# EAGLE board MainBoard 1.5.2 (EAGLE 9.6.2)
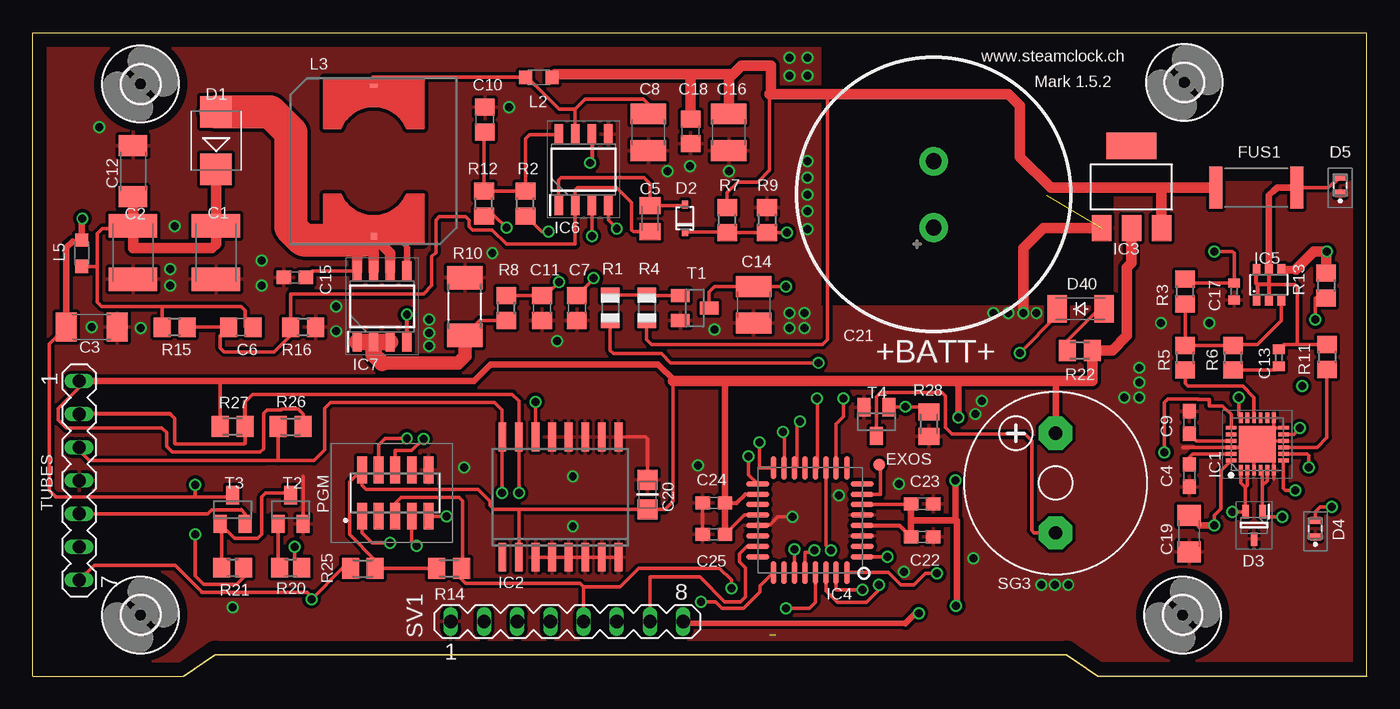
[diagram p0: board, top side]
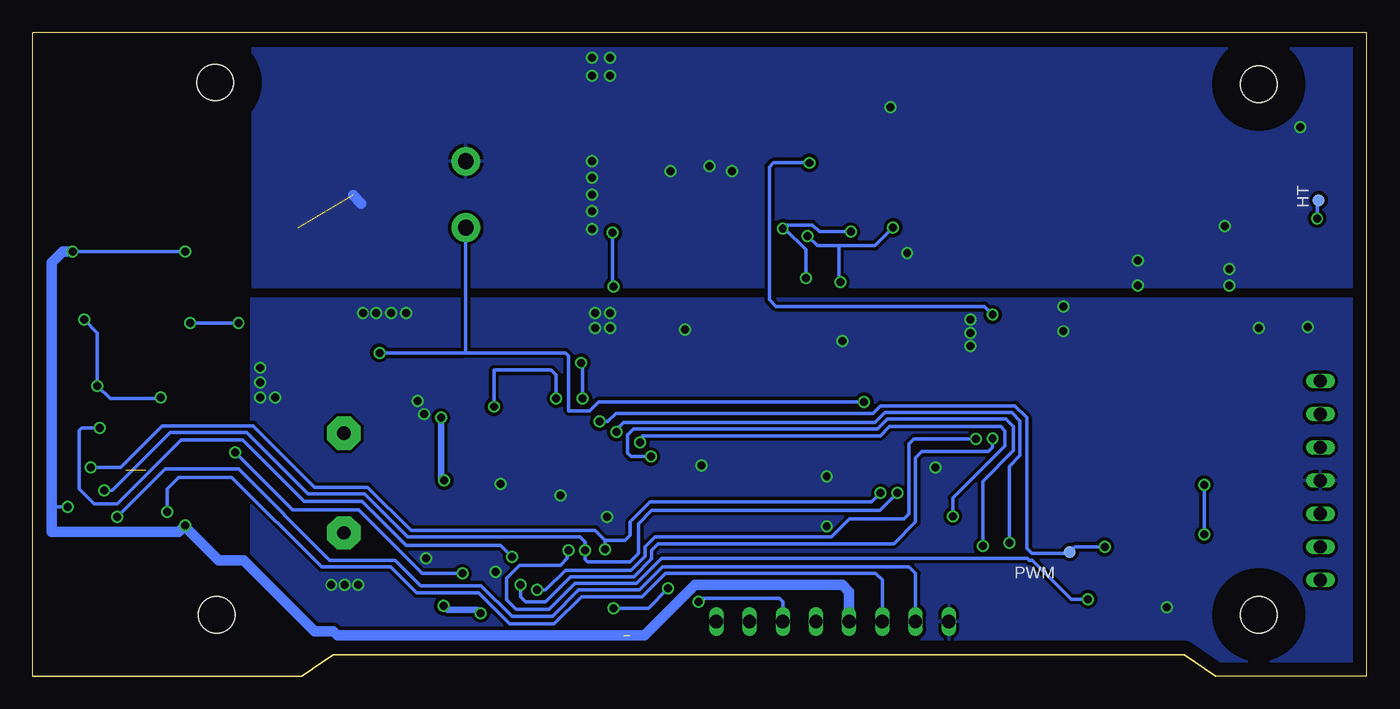
[diagram p1: board, bottom side, seen from below]

Size 102.11 x 49.28 mm. Coordinates in mm from the lower left corner, seen from the top.
Outline: 0,49.28 102.11,49.28 102.11,0 81.53,0 79.12,1.65 13.97,1.65 11.56,0 0,0 0,49.28
Copper layers (1*16): Top 0.035mm / dielectric 1.5mm / Bottom 0.035mm
Design rules "default *": minimum track width 10mil, minimum drill 24mil, track to track 4mil, track to pad 1mil, pad to pad 1mil, via to via 8mil, smd to smd 8mil, copper to edge 40mil, drill to drill 8mil, minimum pad ring 1mil, minimum via ring 3mil, stop-mask expansion 4mil, vias tented up to drill 0mil, thermal gap 10mil
Net classes: 0 default: width 0.254 mm, clearance 0.254 mm; 1 pwr: width 0.254 mm, clearance 0.356 mm

## Footprints (pad centres in the part's own frame; a part is rotated, then mirrored left to right if it is on the bottom)
C1812K = smd 1.8 x 3.7: 1 -2.05,0; 2 2.05,0
C1808 = smd 1.6 x 2.2: 1 -1.95,0; 2 1.95,0
C0603 = smd 1.1 x 1: 1 -0.85,0; 2 0.85,0
C0805K = smd 1.3 x 1.6: 1 -1,0; 2 1,0
C0805 = smd 1.3 x 1.5: 1 -0.95,0; 2 0.95,0
C1210 = smd 1.6 x 2.7: 1 -1.4,0; 2 1.4,0
C0402 = smd 0.7 x 0.9: 1 -0.65,0; 2 0.65,0
C1206 = smd 1.6 x 1.8: 1 -1.4,0; 2 1.4,0
CAP0805-NP = smd 1.524 x 1.524: 1 0,0; 2 2.286,0
ELNA21.5X8.0 = drill 1.2 pad 2.184: + -2.54,0; - 2.54,0
SMB = smd 2.4 x 2.4: A 2.2,0; C -2.2,0
SOD323 = smd 0.6 x 0.45: A 1.06,0; C -1.06,0
SOT65P210X110-3N = smd 1.05 x 0.5: 1 -1.05,0.65; 2 -1.05,-0.65; 3 1.05,0
ESDA8P801U1M = smd 0.55 x 0.8: 1 -0.625,0; 2 0.625,0
SOD-123_MINI-SMA = smd 1.5 x 2.1: A 1.8,0; C -1.8,0
TP09R = smd 0.9 x 0.9: TP 0,0
R6332 = smd 1 x 3.2: 1 -3.1,0; 2 3.1,0
2,8 = hole 2.8: 0,0
QFN50P400X400X100-25N = smd 0.8 x 0.3: 1 -2,1.25; 2 -2,0.75; 3 -2,0.25; 4 -2,-0.25; 5 -2,-0.75; 6 -2,-1.25; 13 2,-1.25; 14 2,-0.75; 15 2,-0.25; 16 2,0.25; 17 2,0.75; 18 2,1.25 | smd 0.3 x 0.8: 7 -1.25,-2; 8 -0.75,-2; 9 -0.25,-2; 10 0.25,-2; 11 0.75,-2; 12 1.25,-2; 19 1.25,2; 20 0.75,2; 21 0.25,2; 22 -0.25,2; 23 -0.75,2; 24 -1.25,2 | smd 2.8 x 2.8: 25 0,0
SO16W = smd 0.6 x 2.2: 1 -4.445,-4.6; 2 -3.175,-4.6; 3 -1.905,-4.6; 4 -0.635,-4.6; 5 0.635,-4.6; 6 1.905,-4.6; 7 3.175,-4.6; 8 4.445,-4.6; 9 4.445,4.6; 10 3.175,4.6; 11 1.905,4.6; 12 0.635,4.6; 13 -0.635,4.6; 14 -1.905,4.6; 15 -3.175,4.6; 16 -4.445,4.6
SOT223 = smd 1.499 x 2.007: 1 -2.261,-3.15; 2 0.025,-3.15; 3 2.311,-3.15 | smd 3.81 x 2.007: 4 0,3.15
QFP032 = smd 0.432 x 1.778: 1 0,0; 2 0.8,0; 3 1.599,0; 4 2.399,0; 5 3.199,0; 6 3.998,0; 7 4.798,0; 8 5.598,0; 17 5.588,8.001; 18 4.798,7.997; 19 3.998,7.997; 20 3.199,7.997; 21 2.399,7.997; 22 1.599,7.997; 23 0.799,7.997; 24 0,7.997 | smd 1.778 x 0.432: 9 6.807,1.194; 10 6.807,2.007; 11 6.807,2.794; 12 6.807,3.607; 13 6.807,4.394; 14 6.807,5.182; 15 6.807,5.994; 16 6.816,6.803; 25 -1.194,6.807; 26 -1.194,5.994; 27 -1.194,5.182; 28 -1.194,4.394; 29 -1.194,3.607; 30 -1.194,2.794; 31 -1.194,2.007; 32 -1.194,1.194
SOT23-6 = smd 0.6 x 0.9: 1 -0.95,-1.15; 2 0,-1.15; 3 0.95,-1.15; 4 0.95,1.15; 5 0,1.15; 6 -0.95,1.15
SOIC127P600X175-8N = smd 1.525 x 0.65: 1 -2.712,1.905; 2 -2.712,0.635; 3 -2.712,-0.635; 4 -2.712,-1.905; 5 2.712,-1.905; 6 2.712,-0.635; 7 2.712,0.635; 8 2.712,1.905
SOIC127P600X175-8N' = smd 1.525 x 0.7: 1 -2.712,1.905; 2 -2.712,0.635; 3 -2.712,-0.635; 4 -2.712,-1.905; 5 2.712,-1.905; 6 2.712,-0.635; 7 2.712,0.635; 8 2.712,1.905
L2012C = smd 1 x 1: 1 -1,0; 2 1,0
MSS7341 = smd 0.61 x 0.305: 1 0,5.765 | smd 0.5 x 0.5: 2 0,-5.765
2002132100010C4LF = smd 0.76 x 2.05: 1 2.54,1.775; 2 2.54,-1.775; 3 1.27,1.775; 4 1.27,-1.775; 5 0,1.775; 6 0,-1.775; 7 -1.27,1.775; 8 -1.27,-1.775; 9 -2.54,1.775; 10 -2.54,-1.775
R0805 = smd 1.1 x 1.4: 1 -1,0; 2 1,0
R0805' = smd 1.3 x 1.5: 1 -0.95,0; 2 0.95,0
R2010 = smd 1.8 x 2.7: 1 -2.2,0; 2 2.2,0
M2012 = smd 1.3 x 1.6: 1 -0.95,0; 2 0.95,0
R2012 = smd 1.3 x 1.5: 1 -0.85,0; 2 0.85,0
F/CM12P = drill 1.016 pad 2.54 octagon: + 3.81,0; - -3.81,0
MA08-1 = drill 1.016 long: 1 -8.89,0; 2 -6.35,0; 3 -3.81,0; 4 -1.27,0; 5 1.27,0; 6 3.81,0; 7 6.35,0; 8 8.89,0
SOT23 = smd 1 x 1.4: 1 -0.95,-1.1; 2 0.95,-1.1; 3 0,1.1
MA07-1 = drill 1.016 long: 1 -7.62,0; 2 -5.08,0; 3 -2.54,0; 4 0,0; 5 2.54,0; 6 5.08,0; 7 7.62,0

## Placement (x,y rotation side)
C1  1uF  [C1812K]  14.03,32.45 270 top
C2  1uF  [C1812K]  7.68,32.45 270 top
C3  0.1uF  [C1808]  4.51,26.73 0 top
C4  1uF  [C0603]  88.52,15.37 90 top
C5  220pF  [C0805K]  47.24,35.05 270 top
C6  100pF  [C0805]  15.94,26.73 180 top
C7  430pF  [C0805]  41.66,28.19 270 top
C8  100uF  [C1210]  47.12,41.66 90 top
C9  1uF  [C0603]  88.52,19.43 270 top
C10  100nF  [C0805]  34.61,42.61 90 top
C11  1nF  [C0805]  38.99,28.19 270 top
C12  0.1uF  [C1808]  7.68,38.67 90 top
C13  100nF  [C0402]  95.38,24.38 90 top
C14  47uF  [C1210]  55.18,28.45 270 top
C15  560pF/250V  [C0603]  20.07,30.54 180 top
C16  100uF  [C1210]  53.28,41.66 90 top
C17  100nF  [C0402]  91.95,29.46 90 top
C18  0.1uF  [C0805]  50.36,41.72 270 top
C19  4uF7  [C1206]  88.52,10.92 90 top
C20  0.1uF  [CAP0805-NP]  47.05,12.76 90 top
C21  [ELNA21.5X8.0]  68.96,36.89 90 top
C22  100n  [C0603]  68.07,10.67 0 top
C23  100nF  [C0603]  68.07,13.21 0 top
C24  100nF  [C0603]  52.13,13.27 180 top
C25  100nF  [C0603]  52.13,10.86 180 top
D1  ES1D  [SMB]  14.03,41.02 90 top
D2  BAT54  [SOD323]  49.91,35.05 90 top
D3  ESDA25W  [SOT65P210X110-3N]  93.47,11.56 270 top
D4  ESDA25P35-1U1M  [ESDA8P801U1M]  98.17,11.3 90 top
D5  ESDA25P35-1U1M  [ESDA8P801U1M]  100.08,37.59 90 top
D40  CGRM4001-G  [SOD-123_MINI-SMA]  80.2,28.13 0 top
EXOS  PTR1TP09R  [TP09R]  64.77,16.19 0 top
FUS1  [R6332]  93.66,37.4 180 top
H3  MOUNT-HOLE2.8  [2,8]  8.26,45.34 0 top
H4  MOUNT-HOLE2.8  [2,8]  8.26,4.7 0 top
H5  MOUNT-HOLE2.8  [2,8]  88.01,4.7 0 top
H6  MOUNT-HOLE2.8  [2,8]  88.14,45.47 0 top
HT  PTR1TP09R  [TP09R]  3.68,36.45 0 bottom
IC1  STUSB4500QTR  [QFN50P400X400X100-25N]  93.73,17.78 90 top
IC2  DS3231/SO  [SO16W]  40.39,13.72 0 top
IC3  REG1117  [SOT223]  84.07,37.46 0 top
IC4  ATMEGA328  [QFP032]  63.5,9.14 90 top
IC5  STT4P3LLH6SOT23_6  [SOT23-6]  94.61,29.97 0 top
IC6  UCC3803DTR  [SOIC127P600X175-8N]  42.16,38.8 90 top
IC7  FDS2672  [SOIC127P600X175-8N']  26.73,28.32 90 top
L2  60 Ohms @ 100MHz  [L2012C]  38.73,45.85 180 top
L3  33uH  [MSS7341]  26.1,39.43 0 top
L5  Ferrite  [L2012C]  3.75,32.38 90 top
PGM  20021321-00010C4LF  [2002132100010C4LF]  27.75,14.03 180 top
PWM  PTR1TP09R  [TP09R]  22.73,9.53 0 bottom
R1  100k  [R0805]  44.2,28.19 270 top
R2  60k4  [R0805']  37.72,36.2 90 top
R3  100k  [R0805']  88.2,29.46 90 top
R4  100k  [R0805]  46.99,28.19 270 top
R5  22k  [R0805']  88.2,24.38 90 top
R6  100R  [R0805']  91.88,24.38 90 top
R7  2k  [R0805']  53.15,34.92 90 top
R8  1k  [R0805']  36.26,28.19 90 top
R9  100k  [R0805']  56.2,34.92 270 top
R10  0R2  [R2010]  33.08,28.32 90 top
R11  1k  [R0805']  99.06,24.45 270 top
R12  4.12k  [R0805']  34.54,36.2 90 top
R13  1k  [R0805']  99,29.91 270 top
R14  1k  [M2012]  31.88,8.26 0 top
R15  634k  [R0805']  10.86,26.73 180 top
R16  7.68k  [R0805']  20.7,26.73 180 top
R20  47k  [R2012]  19.75,8.32 0 top
R21  100k  [R2012]  15.3,8.32 0 top
R22  1k  [M2012]  80.14,24.96 180 top
R25  1k  [M2012]  25.27,8.26 180 top
R26  1k  [M2012]  19.75,19.11 180 top
R27  1k  [M2012]  15.3,19.11 0 top
R28  1k  [M2012]  68.58,19.3 90 top
SG3  F/CM12P  [F/CM12P]  78.3,14.8 90 top
SV1  Support  [MA08-1]  40.89,4.19 0 top
T1  MMBTA42  [SOT23]  50.67,28.19 270 top
T2  MMBTA42  [SOT23]  19.75,12.76 0 top
T3  MMBTA42  [SOT23]  15.3,12.76 0 top
T4  BSS123  [SOT23]  64.58,19.49 180 top
TUBES  [MA07-1]  3.56,14.99 270 top

## Library data of the parts
C1 C2 = rcl; MOUSER: 810-C4532X7T2E105MST; SPICEPREFIX: C; TDK: C4532X7T2E105M250KE
C3 C12 = rcl; KEMET: CAN17C104KARACTU; MOUSER: 80-CAN17C104KARACTU; SPICEPREFIX: C
C4 = rcl; MOUSER_PART_NUMBER: 81-GRM155R61E105KA2D; SPICEPREFIX: C
C5 C9 C14 C15 C18 C22-C25 = rcl; SPICEPREFIX: C
C6 C7 C10 C11 = rcl; MOUSER: 791-0603X106K100CT; SPICEPREFIX: C
C8 C16 = rcl; MOUSER: 963-EMK325ABJ107MM-P; SPICEPREFIX: C; TAIYO_YUDEN: EMK325ABJ107MM-P
C13 C17 = rcl; MOUSER_PART_NUMBER: 710-885012205050; SPICEPREFIX: C
C19 = rcl; MOUSER_PART_NUMBER: 810-CGA5L1X7R1E475MC; SPICEPREFIX: C
C20 IC4 = MySMD
C21 = Elkos; MOUSER: 555-DB-5R5D474T
D1 = diode
D2 = sp4020_11; MF: Littelfuse; MPN: SP4020-01FTG; OC_FARNELL: unknown; OC_NEWARK: 05X0400
D3 = SamacSys_Parts; DESCRIPTION: STMicroelectronics ESDA25W Dual Uni-Directional TVS Diode Array, 400W peak, 3-Pin SOT-323; HEIGHT: 1.1mm; MANUFACTURER_NAME: STMicroelectronics; MANUFACTURER_PART_NUMBER: ESDA25W; MOUSER_PART_NUMBER: 511-ESDA25W; MOUSER_PRICE-STOCK: https://www.mouser.com/Search/Refine.aspx?Keyword=511-ESDA25W
D4 D5 = SamacSys_Parts; DESCRIPTION: STMicroelectronics ESDA25P35-1U1M, Uni-Directional TVS Diode, 1400W, 2-Pin QFN; HEIGHT: 0mm; MANUFACTURER_NAME: STMicroelectronics; MANUFACTURER_PART_NUMBER: ESDA25P35-1U1M; MOUSER_PART_NUMBER: 511-ESDA25P35-1U1M; MOUSER_PRICE-STOCK: https://www.mouser.co.uk/ProductDetail/STMicroelectronics/ESDA25P35-1U1M?qs=aVyJF2WnouQUWqgNP85ZrA%3D%3D
D40 = diode; MOUSER: 863-NSR0320MW2T1G
EXOS HT PWM = testpad
FUS1 = rcl; MOUSER: 530-0ZCG0150AF2C; SPICEPREFIX: R
H3-H6 = holes
IC1 = SamacSys_Parts; DESCRIPTION: USB Interface IC CONDITIONING & INTERFACES; HEIGHT: 1mm; MANUFACTURER_NAME: STMicroelectronics; MANUFACTURER_PART_NUMBER: STUSB4500QTR; MOUSER_PART_NUMBER: 511-STUSB4500QTR; MOUSER_PRICE-STOCK: https://www.mouser.com/Search/Refine.aspx?Keyword=511-STUSB4500QTR
IC2 = DS3231; AVAILABILITY: Unavailable; MF: Maxim Integrated; MP: DS3231; PACKAGE: SOIC-16 Maxim Integrated; PRICE: None
IC3 = burr-brown; MPN: REG1117; OC_FARNELL: 1097566; OC_NEWARK: 14P6981
IC5 = STT4P3LLH6; AVAILABILITY: Unavailable; DESCRIPTION: P-Channel 30 V, 0.048 Ohm typ., 4 A STripFET H6 Power MOSFET in a SOT23-6L package; MF: STMicroelectronics; MP: STT4P3LLH6; PACKAGE: SOT-23-6 STMicroelectronics; PRICE: None
IC6 = UCC3803DTR; DESCRIPTION: Switching Controllers Low-Power BiCMOS Current-Mode PWM; HEIGHT: 1.75mm; MANUFACTURER_NAME: Texas Instruments; MANUFACTURER_PART_NUMBER: UCC3803DTR; MOUSER_PART_NUMBER: 595-UCC3803DTR; MOUSER_PRICE-STOCK: https://www.mouser.com/Search/Refine.aspx?Keyword=595-UCC3803DTR
IC7 = FDS2672; DESCRIPTION: FDS2672, N-channel MOSFET Transistor 3.9 A 200 V, 8-Pin SOIC; HEIGHT: 1.75mm; MANUFACTURER_NAME: Fairchild Semiconductor; MANUFACTURER_PART_NUMBER: FDS2672; MOUSER_PART_NUMBER: 512-FDS2672; MOUSER_PRICE-STOCK: https://www.mouser.com/Search/Refine.aspx?Keyword=512-FDS2672; RS_PART_NUMBER: 6710481P; RS_PRICE-STOCK: http://uk.rs-online.com/web/p/products/6710481P
L2 L5 = rcl; SPICEPREFIX: L
L3 = STEAM-inductor-coilcraft; MOUSER: 710-784770330
PGM = SamacSys_Parts; DESCRIPTION: Headers & Wire Housings 1.27x1.27mm BTB, Hdr Recept, SMT, 10 Pos; HEIGHT: 4.75mm; MANUFACTURER_NAME: Amphenol; MANUFACTURER_PART_NUMBER: 20021321-00010C4LF; MOUSER_PART_NUMBER: 649-202132100010C4LF; MOUSER_PRICE-STOCK: https://www.mouser.com/Search/Refine.aspx?Keyword=649-202132100010C4LF
R1 R4 R10 R14 R20-R22 R25-R28 = adafruit
R2 R3 R5 R6 R8 R9 R11 R13 = rcl; SPICEPREFIX: R
R7 = rcl; MOUSER: 754-RR1220P-202D; SPICEPREFIX: R; SUSUMU: RR1220P-202-D
R12 = rcl; KOASPEER: RN732ATTD4121F100; MOUSER: 660-RN732ATD4121F100; SPICEPREFIX: R
R15 = rcl; MOUSER: 71-CRCW0603-634K-E3; SPICEPREFIX: R; VISHAY: CRCW0603634KFKEA
R16 = rcl; MOUSER: 71-CRCW0805-7.68K-E3; SPICEPREFIX: R; VISHAY: CRCW08057K68FKEA
SG3 = buzzer; OC_FARNELL: unknown; OC_NEWARK: unknown
SV1 TUBES = con-lstb; OC_FARNELL: unknown; OC_NEWARK: unknown
T1-T3 = transistor
T4 = transistor-small-signal

## Nets
+5V [pwr]: C20.1 C22.1 C23.1 C24.1 C25.1 IC2.2 IC3.2 IC4.4 IC4.6 IC4.18 IC4.20 PGM.2 R14.1 R22.1 R25.1 R26.1 R27.1 SG3.+ SV1.8 TUBES.1
ALERT: IC1.19 IC4.32
ATTACH: IC1.11 IC4.1
BATT: C21.+ D40.C IC2.14
BUZ: IC4.10 R28.2 T4.1
CC1: D3.2 IC1.1 IC1.2 SV1.3
CC2: D3.1 IC1.4 IC1.5 SV1.2
COM: C1.2 C2.2 C3.2 C4.1 C7.2 C8.1 C9.1 C10.2 C11.2 C12.2 C14.2 C15.2 C16.1 C17.1 C18.2 C19.1 C20.2 C21.- C22.2 C23.2 C24.2 C25.2 D3.3 D4.1 D5.1 IC1.3 IC1.6 IC1.10 IC1.12 IC1.13 IC1.22 IC1.25 IC2.3 IC2.4 IC2.5 IC2.6 IC2.7 IC2.8 IC2.9 IC2.10 IC2.11 IC2.12 IC2.13 IC3.1 IC4.3 IC4.5 IC4.21 IC6.5 PGM.10 R9.1 R10.2 R16.1 R28.1 SV1.1 T1.2 T2.2 T4.2 TUBES.4
CS: C11.1 IC6.3 R8.2 R12.1
FB: C5.2 C6.2 IC6.2 R15.1 R16.2
HT: T3.2 TUBES.5
HT-ENABLE: IC4.12 R1.2
IRQ: IC4.11 R25.2 TUBES.7
LDR: IC4.23 SV1.7
LED: IC4.25 SV1.6
MISO: IC4.16 PGM.9
MOSI: IC4.15 PGM.1
N$1: C4.2 IC1.23
N$2: C9.2 IC1.21
N$3: SG3.- T4.3
N$5: EXOS.TP IC4.7
N$6: C1.1 C2.1 C6.1 C12.1 D1.C L5.1 R15.2
N$7: R21.1 T2.3 T3.1
N$8: R1.1 R4.1 T1.1
N$9: C14.1 D2.C R7.1 R9.2 T1.3
N$10: C5.1 D2.A IC6.1
N$11: IC5.3 R3.1 R5.2 R6.2
N$12: IC7.1 IC7.2 IC7.3 R8.1 R10.1
N$13: C13.1 R6.1
N$14: C8.2 IC6.7 L2.2 L3.1
N$17: IC1.16 R5.1
N$18: C15.1 D1.A IC7.5 IC7.6 IC7.7 IC7.8 L3.2
N$19: R20.1 T2.1
N$21: IC1.9 R11.2
N$22: IC1.18 R13.2
N$23: D40.A R22.2
OUT: IC6.6 IC7.4
POSTFUSE [pwr]: C16.2 C18.1 FUS1.2 IC3.3 L2.1 R4.2 R7.2
PWM: IC4.14 PWM.TP R20.2
RAW_HT: C3.1 HT.TP L5.2 R21.2 T3.3
RC: C7.1 IC6.4 R2.1
REF: C10.1 IC6.8 R2.2 R12.2
RESET: IC4.29 PGM.5 R14.2 SV1.5
RX: IC4.30 PGM.4
SCK: IC4.17 PGM.7
SCL: IC1.7 IC2.16 IC4.28 R26.2 TUBES.3
SDA: IC1.8 IC2.15 IC4.27 R27.2 TUBES.2
TX: IC4.31 PGM.6
VBUS: C17.2 C19.2 D4.2 IC1.24 IC5.4 R3.2 R13.1 SV1.4
VCC [pwr]: C13.2 D5.2 FUS1.1 IC5.1 IC5.2 IC5.5 IC5.6 R11.1

## Tracks (layer width: path | path; a pad name or v marks a point on that pad's centre or on a via)
+5V  (via drill 0.61)
  Top 0.254: 37.21,12.76 35.31,12.76 34.99,13.08 34.99,13.4 34.09,14.3 25.52,14.3 25.21,14.6 PGM.2 24.27,14.87 24.27,10.85 26.22,8.89 R25.1 R14.1 | 37.21,12.76 C20.1 48.39,12.76 49.02,13.4 49.02,22.61 | IC2.2 37.21,12.76 | IC4.20 54.47,12.34 C25.1 | 20.7,22.6 20.7,22.61 | R26.1 20.7,20.07 20.32,20.45 19.05,20.45 19,20.4 17.95,20.4 17.67,20.11 17.67,17.41 17.41,17.16 10.68,17.16 10.25,17.59 10.25,18.67 9.89,19.02 2.57,19.02 1.96,19.63 1.96,20.5 3.56,22.1 TUBES.1 | 14.48,22.61 14.35,22.48 R27.1 | IC4.18 54.54,13.94 | C24.1 52.98,22.5 53.09,22.61 | IC4.6 67.16,13.14
  Top 0.305: IC4.4 66.35,11.54 C22.1 | 67.16,13.14 C23.1 | C24.1 53.87,13.27 54.54,13.94
  Top 0.406: 66.8,4.06 49.91,4.06
  Top 0.508: C25.1 C24.1 52.98,22.61 | TUBES.1 14.48,22.61 20.7,22.61 33.78,22.61 35.05,23.88 47.88,23.88 49.15,22.61 | 67.22,11.94 C22.1 | 70.87,22.61 v70.87,19.81 | v70.61,14.99 70.61,11.94 | SG3.+ 78.3,22.54 78.36,22.61 | 67.22,11.94 70.61,11.94 | 70.61,11.94 70.74,11.94 70.74,5.46 v70.68,5.4 | 67.22,11.94 C23.1 | v67.82,4.83 67.69,4.95 66.8,4.06 | 49.91,4.06 SV1.8
  Top 0.813: IC3.2 84.1,31.65 83.74,31.29 83.74,26.09 82.61,24.95 R22.1 81.09,22.61 78.36,22.61 70.87,22.61 70.74,22.61 53.09,22.61 | 49.02,22.61 49.15,22.61 52.98,22.61
  Bottom 0.508: v70.68,5.4 70.36,5.08 68.07,5.08 v67.82,4.83 | v70.87,19.81 70.87,15.24 v70.61,14.99
ALERT  (via drill 0.61)
  Top 0.254: v86.61,17.15 86.61,20.95 86.87,21.21 89.18,21.21 90.04,21.21 90.04,20.71 91.05,20.71 91.73,20.03 IC1.19 | IC4.32 65.48,7.95 66.45,6.98 67.44,6.98 68.33,7.87 v69.22,7.87
  Bottom 0.254: v69.22,7.87 72.3,7.87 77.17,12.75 82.22,12.75 v86.61,17.15
ATTACH  (via drill 0.61)
  Top 0.254: v65.41,9.14 IC4.1 | IC1.11 96.51,18.53 v96.97,18.99
  Bottom 0.254: v96.97,18.99 98.37,18.99 98.55,18.81 98.55,14.35 97.41,13.21 95.63,13.21 90.74,18.1 86.04,18.1 81.34,13.4 76.9,13.4 73.53,10.03 66.29,10.03 v65.41,9.14
BATT  (via drill 0.61)
  Top 0.254: IC2.14 v38.48,21.02 | D40.C 78.4,27.6 v75.56,24.77
  Bottom 0.254: v38.48,21.02 58.8,21.02 59.5,20.32 61.09,20.32 61.09,24.51 61.34,24.77 v75.56,24.77 69.09,24.77 68.96,24.89 C21.+
BUZ  (via drill 0.61)
  Top 0.254: IC4.10 61.49,19.33 62.04,19.88 v62.04,21.27 | v66.8,20.64 66.86,20.64 | v66.8,20.64 68.58,20.64 R28.2 | v66.8,20.64 65.57,20.64 T4.1
  Bottom 0.254: v66.8,20.64 66.8,23.43 62.42,23.43 62.04,23.05 v62.04,21.27
CC1  (via drill 0.61)
  Top 0.254: IC1.2 92.98,14.62 92.82,14.46 | v91.82,12.57 92.79,12.57 D3.2 92.82,14.46 | IC1.1 92.48,14.81 92.82,14.46
  Bottom 0.254: v91.82,12.57 91.82,14.35 90.93,15.24 86.87,15.24 80.01,8.38 74.72,8.38 72.73,6.39 67.99,6.39 65.6,4 62.21,4 60.12,6.1 55.46,6.1 53.69,7.87 37.59,7.87 37.08,7.37 SV1.3
CC2  (via drill 0.61)
  Top 0.254: IC1.4 94.12,15.63 94.12,14.6 | 94.12,14.6 D3.1 94.12,12.19 v95.63,12.19 | IC1.5 94.48,14.96 94.12,14.6
  Bottom 0.254: v95.63,12.19 91.95,15.88 86.36,15.88 79.38,8.89 74.38,8.89 72.43,6.94 67.78,6.94 65.44,4.6 62.33,4.6 60.32,6.6 55.67,6.6 53.89,8.38 35.05,8.38 34.54,7.87 SV1.2
COM  (via drill 0.61)  (2 unrouted)
  Top 0.254: IC4.3 63.45,10.69 | IC2.8 IC2.7 IC2.6 IC2.5 IC2.4 IC2.3 | IC2.9 46.9,18.32 47.05,18.16 C20.2 | C24.2 C25.2 51.22,10.92 | 20.7,15.3 T2.2 | IC4.21 55.6,11.64 56.47,11.64 57.01,12.19 v58.17,12.19 | IC1.10 93.98,18.03 | 93.98,18.03 IC1.25 93.48,17.53 | 94.98,19.03 93.98,18.03 | D3.3 | 95,15.11 95,15.76 IC1.6 94.98,16.49 95,16.51 | 93.48,17.53 IC1.22 88.01,17.53 | IC1.12 94.98,19.03 | IC1.13 94.98,19.03 | 93.47,16.64 93.48,16.63 IC1.3 93.48,17.53
  Top 0.813: IC3.1 77.37,34.31 75.82,32.77 v75.82,27.81
  Bottom 0.254: v86.36,27.05 v90.04,27.05 | 72.39,9.14 72.34,9.2 72.33,9.2
  Bottom 0.813: 77.6,36.83 76.96,36.2
  other vias: 15.3,5.27 5.08,42.04 17.53,29.91 10.54,29.91 4.51,26.73 10.86,34.48 10.54,31.18 17.53,31.81 23.24,28.32 23.24,26.42 30.35,26.29 30.35,25.27 57.91,45.97 59.31,45.97 59.31,39.43 59.31,35.62 59.31,36.89 59.31,34.23 35.18,32.38 40.13,25.65 57.91,47.37 59.31,38.16 30.35,27.3 59.31,47.37 41.34,15.3 41.34,11.49 48.58,38.67 53.28,38.67 50.29,39.05 52.2,26.54 36.45,43.56 66.67,8 57.91,27.81 73.53,27.81 76.83,27.81 59.05,27.81 57.91,26.67 59.05,26.67 78.23,6.98 77.22,6.98 50.93,16.13 8.26,26.67 74.68,27.81 83.57,21.34 84.71,23.62 84.71,21.34 84.71,22.48 66.29,14.73 72.14,20.07 72.64,21.08 79.25,6.98 61.72,13.84 33.02,16 72.01,9.02
  pour Top: -1.52,48.32 60.2,48.32 60.2,25.15 -1.52,25.15
  pour Bottom: -4.06,28.89 -4.06,0.06 85.34,0.06 85.34,28.89
  pour Top: -3.75,28.26 -3.75,-2.41 83.31,-2.41 83.31,28.26
  pour Bottom: 85.22,48.32 85.22,29.84 -1.52,29.84 -1.52,48.32
  pour Top: 82.87,37.78 82.87,-3.05 102.49,-3.05 102.49,37.78
CS  (via drill 0.61)
  Top 0.254: R12.1 35.37,35.24 v36.26,34.35 | R8.2 C11.1 39.25,29.14 v40.3,30.19 | IC6.3 v42.8,33.72
  Bottom 0.254: v40.3,30.19 40.39,30.28 40.39,32.96 | v36.26,34.35 37.66,32.96 40.39,32.96 | 40.39,32.96 42.04,32.96 v42.8,33.72
FB
  Top 0.254: R15.1 C6.2 14.35,26.1 14.35,25.15 14.67,24.83 18.48,24.83 19.75,26.1 R16.2 19.75,29.27 29.91,29.27 30.54,29.91 30.54,32.13 30.86,32.45 30.86,34.92 31.12,35.18 33.15,35.18 33.41,34.91 33.41,34.44 33.69,34.16 35.18,34.16 36.26,33.08 41.53,33.08 IC6.2 41.53,37.23 41.7,37.4 44.7,37.4 45.85,36.26 45.85,34.16 45.97,34.04 47.23,34.04 C5.2
HT
  Top 0.254: TUBES.5 13.4,12.45 13.7,12.75 15.92,12.75 15.94,12.76 16.25,12.45 T3.2
HT-ENABLE  (via drill 0.61)
  Top 0.254: IC4.12 60.07,15.95 60.07,21.08 60.01,21.15 v60.01,21.27 | v60.13,24 48.83,24 48.13,24.7 44.45,24.7 44.2,24.95 R1.2
  Bottom 0.254: v60.13,24 60.01,23.88 v60.01,21.27
IRQ  (via drill 0.61)
  Top 0.254: R25.2 23.68,8.26 v21.34,5.9 21.34,6.1 21.02,6.41 12.95,6.41 12.95,6.46 10.9,8.51 4.7,8.51 TUBES.7 | IC4.11 60.71,10.03 v61.09,9.65
  Bottom 0.254: v21.34,5.9 22.61,5.9 25.59,8.89 25.86,8.89 25.99,9.02 53.98,9.02 55.88,7.11 60.58,7.11 62.58,5.11 65.12,5.11 65.85,5.84 65.85,7.49 64.83,8.51 61.72,8.51 61.21,9.02 61.21,9.53 v61.09,9.65
LDR
  Top 0.254: IC4.23 54.66,9.94 54.11,9.39 54.11,8.76 54.55,8.32 54.55,6.1 54.17,5.71 52.96,5.71 51.05,7.62 47.24,7.62 SV1.7
LED  (via drill 0.61)
  Top 0.254: IC4.25 55.68,6.93 55.68,6.48 54.41,5.21 52.75,5.21 52.24,5.71 51.18,5.71 v51.15,5.69
  Bottom 0.254: SV1.6 44.7,5.71 44.96,5.97 50.93,5.97 51.15,5.74 v51.15,5.69
MISO  (via drill 0.61)
  Top 0.254: v31.69,12.26 v31.68,12.26 PGM.9 | IC4.16 55.63,15.96 v55.63,17.91
  Bottom 0.254: v55.63,17.91 55.63,18.23 55.44,18.41 37.23,18.41 36.54,19.11 28,19.11 27.69,18.8 27.69,17.65 31.69,13.65 v31.69,12.26
MOSI  (via drill 0.61)
  Top 0.254: PGM.1 25.21,10.98 25.97,10.22 v27.37,10.22 | IC4.15 57.53,15.98 57.53,18.61 v57.43,18.71
  Bottom 0.254: v27.37,10.22 27.37,16.07 26.54,16.89 26.54,19.56 27.18,20.19 36.89,20.19 37.66,19.43 56.9,19.43 57.43,18.9 v57.43,18.71
N$1
  Top 0.254: C4.2 88.52,16.76 88.78,17.03 IC1.23
N$2
  Top 0.254: IC1.21 89.07,18.03 C9.2
N$3
  Top 0.254: T4.3 64.58,21.4 64.9,21.72 69.6,21.72 69.85,21.46 69.85,19.05 70.36,18.54 75.95,18.54 76.45,18.03 76.45,11.18 76.64,10.98 SG3.-
N$5
  Top 0.254: IC4.7 64.9,13.94 64.9,16.07 EXOS.TP
N$6
  Top 0.254: C6.1 16.26,26.73 16.26,28 15.94,28.32 9.91,28.32 | R15.2 9.91,28.32 | 9.91,28.32 5.27,28.32 4.92,28.67 4.92,31.37 | 4,31.38 L5.1 4.9,31.38 4.92,31.37 | C2.1 7.48,34.29 5.33,34.29 4.92,33.88 4.92,31.37
  Top 0.813: D1.C C1.1 14.03,33.08 13.72,32.77 7.68,32.77 C2.1 C12.1
N$7
  Top 0.254: T2.3 19.58,14.03 17.84,14.03 17.53,13.72 17.53,10.86 17.21,10.54 15.48,10.54 T3.1 14.45,11.56 R21.1
N$8
  Top 0.254: T1.1 47.04,29.14 R4.1 R1.1
N$9  (via drill 0.61)
  Top 0.254: D2.C 53.13,33.99 R7.1 55.12,33.98 R9.2 57.59,33.98 57.66,33.91 v57.72,33.97 | T1.3 51.77,29.42 52.2,29.85 C14.1 v57.66,29.84
  Bottom 0.254: v57.72,33.97 57.72,29.91 v57.66,29.84
N$10
  Top 0.254: IC6.1 40.26,37.97 40.45,38.16 46.8,38.16 47.24,37.72 47.24,36.18 47.37,36.05 | D2.A 49.85,36.05 47.37,36.05 | 47.37,36.05 C5.1
N$11
  Top 0.254: R3.1 R5.2 R6.2 91.95,25.4 93.73,25.4 95.56,27.24 IC5.3
N$12
  Top 0.254: R8.1 34.21,27.24 R10.1
  Top 1.016: 26.73,24 32.57,24 33.08,24.51 R10.1
  Top 1.27: IC7.1 IC7.2 | IC7.2 IC7.3 | 26.73,24 26.1,24.64 IC7.2
N$13
  Top 0.254: R6.1 95.08,23.43 C13.1
N$14
  Top 0.254: C8.2 47.12,43.82 46.74,44.2 42.29,44.2 41.53,43.43 IC6.7 41.53,43.42 40.28,43.42 37.85,45.85 L2.2 26.04,45.85 26.04,45.26 L3.1
N$17
  Top 0.254: R5.1 88.2,22.41 88.39,22.23 92.6,22.23 93.48,21.35 IC1.16
N$18
  Top 0.254: C15.1 21.41,31.03 IC7.8 | L3.2 25.83,33.4 25.46,33.4 26.1,32.77 | 24.83,32.77 25.2,32.77 L3.2 | L3.2 27,33.67 27.37,34.04 28.64,32.77
  Top 0.508: IC7.5 28.64,32.77
  Top 0.813: 26.1,32.77 IC7.7 | L3.2 27.37,32.4 IC7.6 | 24.83,32.77 IC7.8
  Top 2.54: D1.A 18.18,43.22 19.75,41.66 19.75,34.35 20.7,33.4 25.46,33.4
N$19
  Top 0.254: R20.1 18.8,8.42 T2.1
N$21
  Top 0.254: IC1.9 98.3,17.53 99.06,18.29 R11.2
N$22  (via drill 0.61)
  Top 0.254: v98.17,27.3 98.17,28.96 R13.2 | 92.3,21.29 v92.3,21.34 92.3,19.95 IC1.18
  Bottom 0.254: v98.17,27.3 97.16,26.29 v97.16,22.23 96.19,21.26 92.38,21.26 v92.3,21.34
N$23
  Top 0.254: D40.A 81.6,28.13 79.19,25.72 R22.2
OUT  (via drill 0.61)
  Top 0.254: 28.64,27.37 v28.64,27.69
  Top 0.305: IC7.4 28.64,27.37 | IC6.6 42.8,39.43 v42.67,39.31
  Bottom 0.254: v28.64,27.69 29.27,28.32 45.21,28.32 45.72,28.83 45.72,38.99 45.4,39.31 v42.67,39.31
POSTFUSE
  Top 0.254: R4.2 46.99,25.8 47.37,25.42 60.45,25.42 60.83,25.8 60.83,44.58 | R7.2 53.15,37.02 53.98,37.85 55.5,37.85 56.39,38.73 56.39,44.58
  Top 0.813: 53.59,46.1 50.61,46.1 | 50.61,46.1 39.99,46.1 L2.1 | 50.61,46.1 50.36,45.84 C18.1 | C16.2 53.28,45.78 53.59,46.1 | 53.59,46.1 54.23,46.74 56.52,46.74 56.52,44.58 | 56.39,44.58 56.52,44.58 | 56.52,44.58 60.83,44.58 74.68,44.58 75.56,43.69 75.56,39.75 77.91,37.4 86.49,37.4 | 86.49,37.4 FUS1.2 | IC3.3 86.39,37.3 86.49,37.4
PWM  (via drill 0.61)
  Top 0.254: IC4.14 58.48,16.12 58.48,19.24 v58.74,19.49 | R20.2 20.07,8.85 v20.07,9.91
  Bottom 0.254: v58.74,19.49 58.1,19.49 57.47,20.13 37.78,20.13 37.21,20.7 26.92,20.7 26.04,19.81 26.04,9.78 25.65,9.4 22.86,9.4 PWM.TP 22.35,9.91 v20.07,9.91
RAW_HT  (via drill 0.61)
  Top 0.254: T3.3 15.16,13.72 12.45,13.72 | 3.68,34.92 v3.81,35.05 | R21.2 16.15,7.58 15.62,7.05 13.08,7.05 12.45,7.68 v12.45,10.86 | v12.45,14.67 12.45,13.72 | L5.2 3.66,33.3 3.05,33.3 | 12.45,13.72 1.78,13.72 1.27,14.22 1.27,25.45 C3.1
  Top 0.508: 3.05,33.3 2.56,32.81 C3.1 | L5.2 3.75,34.86 3.68,34.92
  Bottom 0.254: v12.45,10.86 v12.45,14.67 | HT.TP 3.81,36.45 v3.81,35.05
RC  (via drill 0.61)
  Top 0.254: R2.1 38.93,34.04 v39.5,34.04 | v44.7,34.29 44.07,34.92 IC6.4 | C7.1 42.93,30.41 v42.93,30.48
  Bottom 0.254: v39.5,34.04 41.91,34.04 42.43,34.56 44.44,34.56 v44.7,34.29 44.56,34.29 42.93,32.66 v42.93,30.48
REF
  Top 0.254: C10.1 34.54,41.59 R12.2 R2.2 37.72,41.14 38.04,41.47 40.26,41.47 IC6.8
RESET  (via drill 0.61)
  Top 0.254: 53.47,7.24 v53.47,6.73 53.47,7.37 52.58,8.26 46.35,8.26 44.96,6.86 42.16,6.86 | v57.66,5.21 59.44,5.21 59.89,5.66 IC4.29 | PGM.5 27.75,13.25 28.19,13.69 32.64,13.69 32.89,13.44 32.89,8.32 R14.2 32.89,8.19 32.8,8.1 32.8,7.46 33.15,7.11 41.91,7.11 42.16,6.86 | SV1.5 42.16,6.86
  Bottom 0.254: v57.66,5.21 54.99,5.21 v53.47,6.73
RX  (via drill 0.61)
  Top 0.254: v28.64,18.23 26.99,18.23 26.48,17.72 PGM.4 | IC4.30 60.71,6.55 61.59,5.66 63.83,5.66 64.77,6.6 v64.77,6.98
  Bottom 0.254: v28.64,18.23 28.64,17.53 28.96,17.21 34.04,17.21 34.54,16.7 34.54,11.81 36.21,10.15 54.23,10.15 54.74,9.64 54.74,8.98 56.09,7.62 60.96,7.62 62.86,5.71 64.39,5.71 64.77,6.1 v64.77,6.98
SCK  (via drill 0.61)
  Top 0.254: v29.4,9.97 29.02,10.35 PGM.7 | IC4.17 54.8,15.43 v54.8,16.83
  Bottom 0.254: v29.4,9.97 29.4,14.92 27.05,17.27 27.05,19.11 27.62,19.69 36.68,19.69 37.45,18.92 56.13,18.92 56.58,18.48 56.58,17.09 56.32,16.83 v54.8,16.83
SCL  (via drill 0.61)
  Top 0.254: TUBES.3 3.56,17.27 4.32,16.51 17.78,16.51 18.8,16.51 | 18.8,16.51 R26.2 | IC4.28 59.11,9.47 59.82,9.47 v59.82,9.65 | v35.94,14.03 IC2.16 35.94,20.38 35.37,20.95 22.8,20.95 22.35,20.51 22.35,17.34 21.53,16.51 18.8,16.51 | IC1.7 95.73,14.38 95.89,14.22 v96.65,14.22
  Bottom 0.254: v96.65,14.22 96.01,14.22 91.57,18.67 85.72,18.67 81.03,13.97 76.71,13.97 73.41,10.67 60.2,10.67 59.82,10.29 v59.82,9.65 59.82,8.95 59.63,8.76 56.39,8.76 55.75,9.4 55.75,11.68 54.74,12.7 37.27,12.7 v35.94,14.03
SDA  (via drill 0.61)
  Top 0.254: R27.2 16.25,17.84 16.19,17.78 10.92,17.78 10.86,17.84 10.86,19.75 10.54,20.07 | IC4.27 58.32,9.69 v58.29,9.72 | v37.21,14.03 IC2.15 37.21,21.09 36.71,21.59 16.83,21.59 16.25,21.02 | IC1.8 97.52,17.03 97.66,16.89 v97.66,16
  Top 0.305: R27.2 16.25,21.02 16.26,21.02 | 10.54,20.07 TUBES.2
  Bottom 0.254: 58.29,10.41 59.05,11.18 73.15,11.18 76.45,14.48 80.52,14.48 85.22,19.18 92.2,19.18 95.38,16 v97.66,16 | v37.21,14.03 37.91,13.33 54.86,13.33 56.39,11.81 56.39,10.79 56.77,10.41 58.29,10.41 | 58.29,10.41 v58.29,9.72
TX  (via drill 0.61)
  Top 0.254: PGM.6 27.75,17.27 29.02,17.27 v29.91,18.16 | IC4.31 61.49,6.6 v63.5,6.6
  Bottom 0.254: v29.91,18.16 34.67,18.16 35.05,17.78 35.05,12.45 35.43,12.06 39.58,12.06 40.99,10.65 54.5,10.65 55.24,9.91 55.24,9.19 56.3,8.13 61.34,8.13 62.86,6.6 v63.5,6.6
VBUS  (via drill 0.61)  (1 unrouted)
  Top 0.254: R3.2 88.5,30.11 C17.2 91.95,32.38 91.82,32.51 v90.42,32.51 | IC1.24 90.93,15.74 90.93,12.83 90.42,12.32 v90.42,11.56 | D4.2 98.17,12.57 98.55,12.95 v99.44,12.95
  Top 0.508: C19.2 89.28,11.56 v90.42,11.56
  Top 0.61: IC5.4 96.65,31.12
  Top 0.813: 96.65,31.12 98.04,32.51 v99.06,32.51 99,32.45 R13.1
  Bottom 0.254: v99.44,12.95 100.64,12.95 | v99.06,32.51 v90.42,32.51
  Bottom 0.813: v99.06,32.51 99.82,32.51 100.64,31.69 100.64,12.95 100.64,11.05 90.93,11.05 v90.42,11.56 90.49,11.49 87.88,8.89 85.98,8.89 80.53,3.44 79.1,3.44 78.78,3.12 56.39,3.12 | SV1.4 39.62,6.48 40.13,6.98 51.44,6.98 55.3,3.12 56.89,3.12
VCC
  Top 0.254: 94.61,29.97 96.65,29.97 96.77,29.85 96.77,25.41 | C13.2 95.74,25.4 96.76,25.4 96.77,25.41 | D5.2 99.58,37.73 99.48,37.73 99.15,37.4 FUS1.1 | 96.77,25.41 96.78,25.4 R11.1
  Top 0.305: IC5.5 94.61,29.97 | 94.61,29.97 IC5.2 | 94.61,29.97 93.73,29.97 | 93.73,29.97 93.66,30.03 IC5.6 | 93.73,29.97 93.73,28.88 IC5.1
  Top 0.508: FUS1.1 95.24,37.4 94.93,37.15 94.61,36.83 IC5.5

## Text on the board
tNames: www.steamclock.ch | Mark 1.5.2 | +BATT+